# Altium PCB Olimex interface board.PcbDoc (part 1 of 2)
Units mm, origin at the board's own origin, x right, y up, seen from the top; angles counter-clockwise.
Board outline 96.01 x 73.71 mm, 4 copper layers (Component Side, Ground Plane, Power Plane, Solder Side), stack 0.98 mm thick; 92 components, 62 nets, 646 pads, 104 vias.
Unrouted connection lines stored in the file: 1.
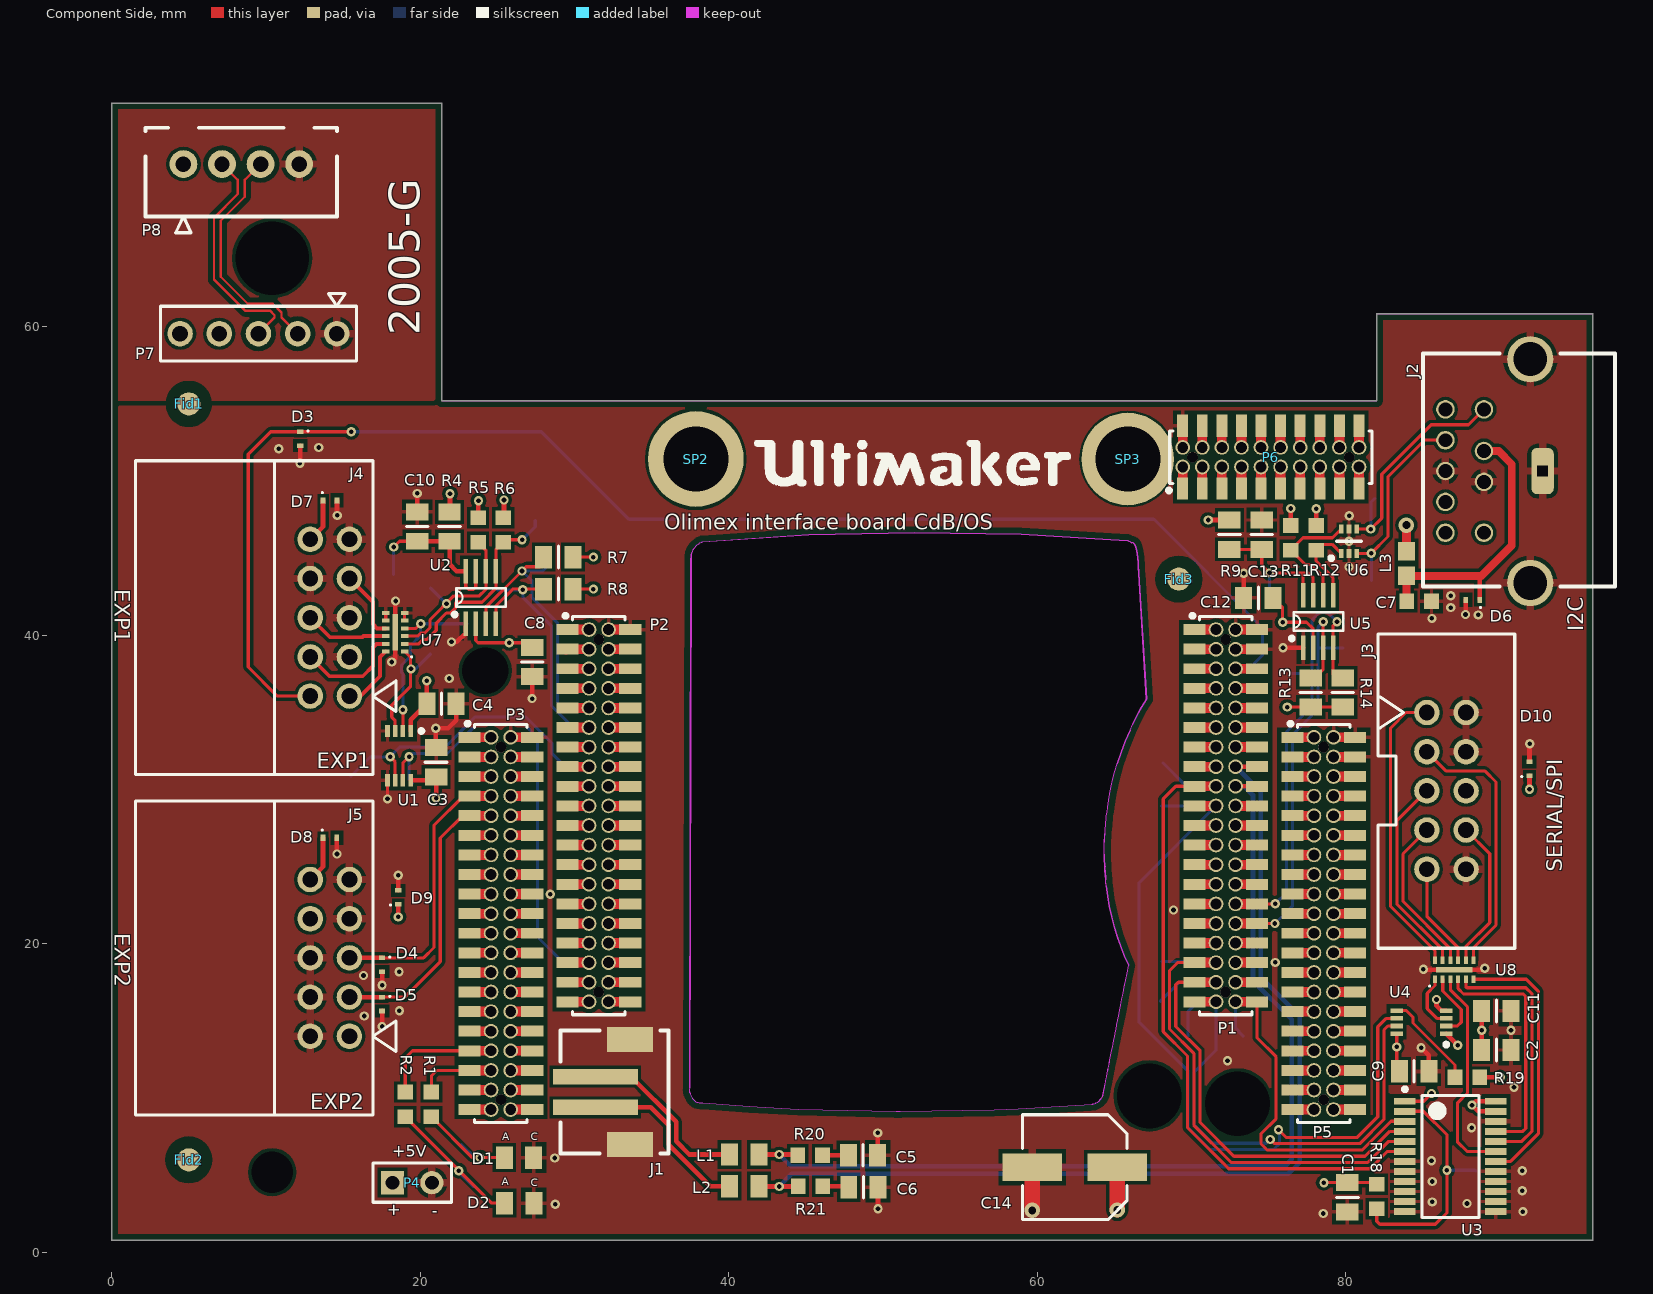
[diagram p0: Component Side view]
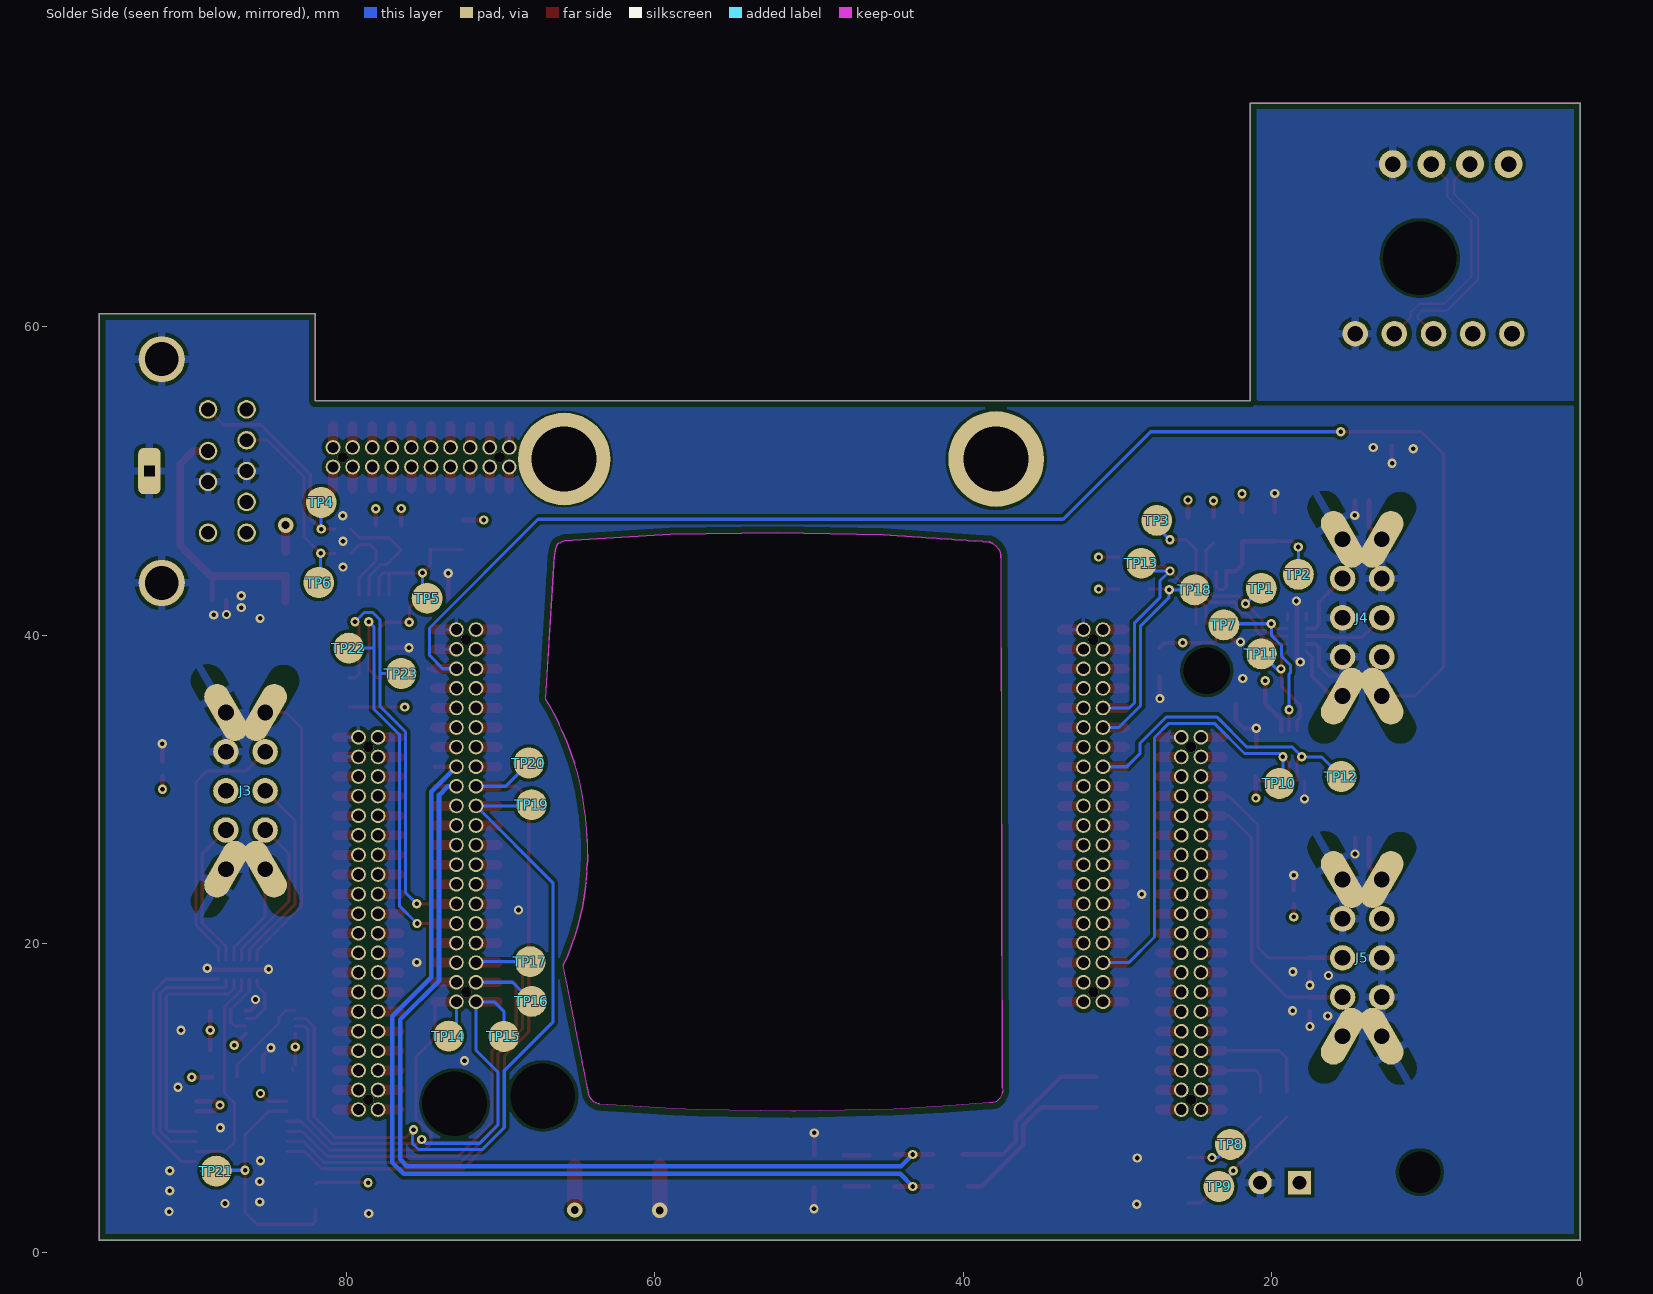
[diagram p1: Solder Side view, seen from below]
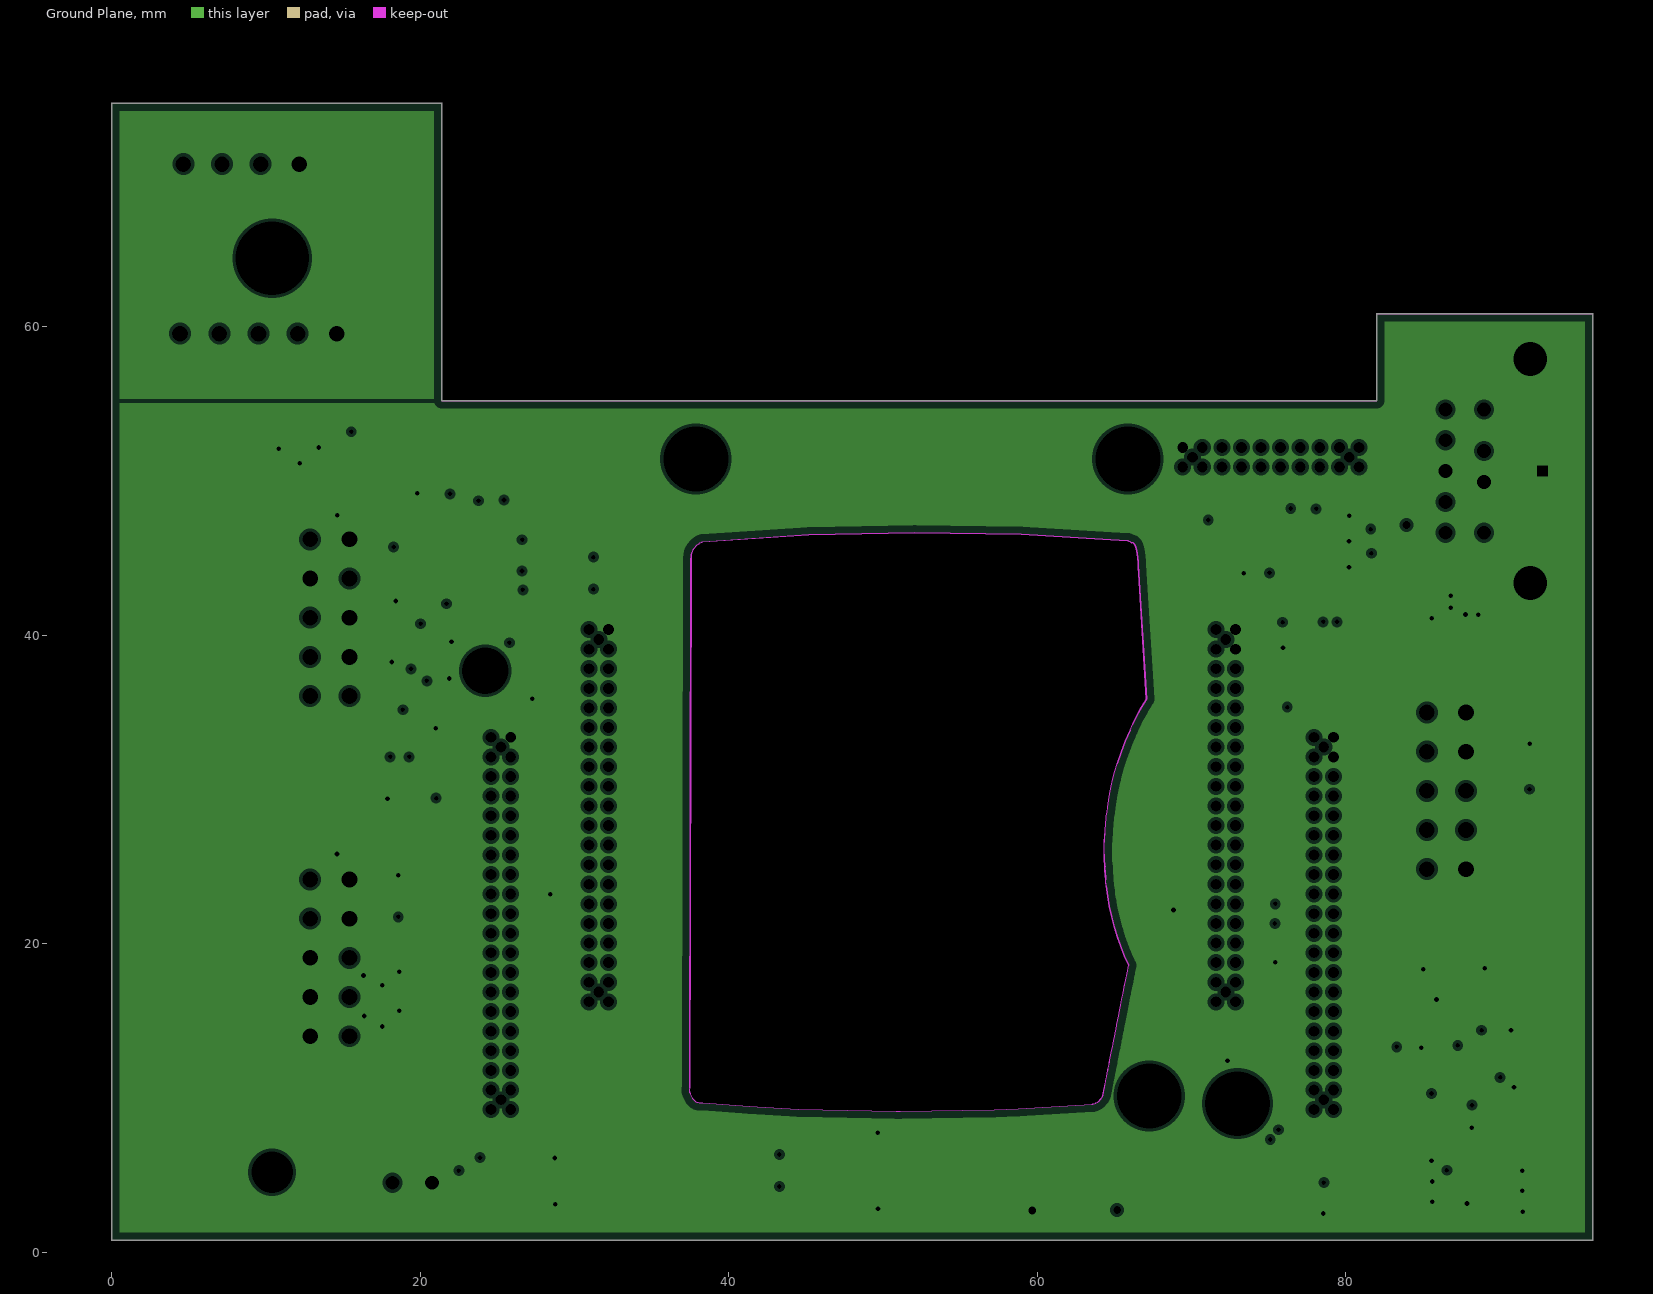
[diagram p2: Ground Plane, clearances drawn from the general rule]
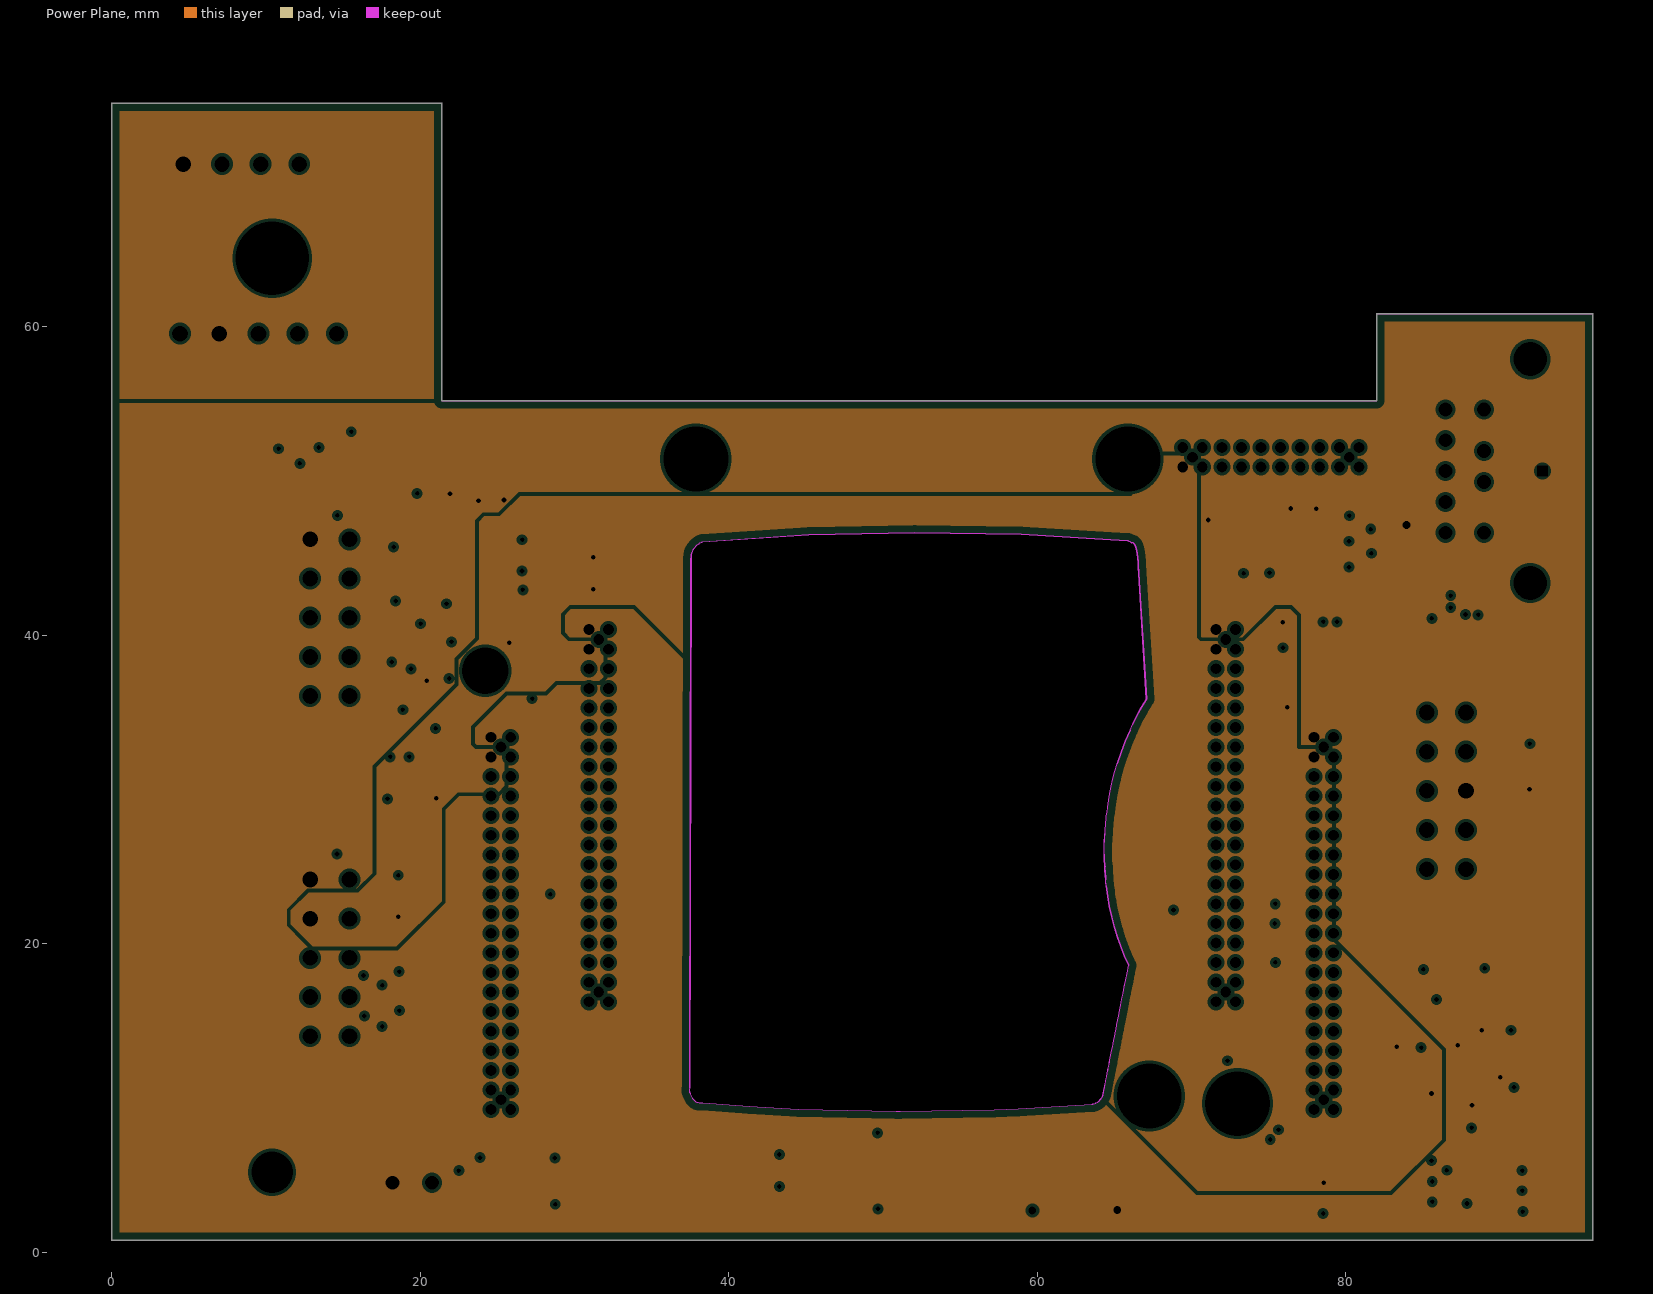
[diagram p3: Power Plane, clearances drawn from the general rule]

## Layer stack, top to bottom
Top Solder: solder mask 0.0102, Solder Resist, Dk 3.5
Component Side: signal copper 0.0356
Dielectric 1: core 0.32, FR-4, Dk 4.8
Ground Plane: plane copper 0.036, net GND
Dielectric 3: prepreg 0.2625, Dk 4.2
Power Plane: plane copper 0.036, net (Multiple Nets)
Dielectric 4: core 0.254, Dk 4.2
Solder Side: signal copper 0.0356
Bottom Solder: solder mask 0.0102, Solder Resist, Dk 3.5

## Board outline
-0.005,0.8 -0.005,74.5 cw(c0,74.5) 0,74.505 21.4,74.505 cw(c21.4,74.5) 21.405,74.5 21.405,55.2 81.995,55.2 81.995,60.85 cw(c82,60.85) 82,60.855 96,60.855 cw(c96,60.85) 96.005,60.85 96.005,0.8 cw(c96,0.8) 96,0.795 0,0.795 cw(c0,0.8)
cut-out: 561 vertices, not listed, extent 37.445,9.158 67.073,46.653

## Design rules (kind name [scope] priority, off if disabled: settings)
Clearance Clearance_1 [InNet('USB_DATA_N') or InNet('USB_DATA_P') vs InPolygon] p1: gap=0.3
Clearance Clearance_USB-GND [InNet('GND') vs InNet('USB_GND')] p2: gap=0.3
Clearance Silktosolder [(IsText AND OnLayer('Bottom Overlay')) vs IsPad] p3: gap=-1.27
Clearance "Board outline" [InPolygon vs OnLayer('Keep-Out Layer')] p4: gap=0.4
Clearance Fiducials [(InComponent('Fid1'))or (InComponent('Fid2'))or  (InComponent('Fid3'))] p5: gap=0.762
Clearance Clearance_Polygon [InComponent('P1') or InComponent('P2') or InComponent('P3') or InComponent('P5') or InComponent('P6') or InComponent('U1') or InComponent('U3') or InComponent('U4') vs InPolygon] p6: gap=0.25
Clearance Clearance_P1,P2,P3,P5,P6 [InComponent('P1') or InComponent('P2') or InComponent('P3') or InComponent('P5') or InComponent('P6') or InComponent('SP3') or InComponent('U1') or InComponent('U3') or InComponent('U4')  or InComponent('U8') or InComponent('U7') or InComponent('U6')] p7: gap=0.127
Clearance [All] p8: gap=0.203
DiffPairsRouting [All] p1: maxlimit=0.3 minlimit=0.3 mostfreqgap=0.3 toplayer_minwidth=0.15 toplayer_maxwidth=0.15 toplayer_prefwidth=0.15 bottomlayer_minwidth=0.15 bottomlayer_maxwidth=0.15 bottomlayer_prefwidth=0.15 maxuncoupledlength=12.7
HoleSize [All] p1: absolutevalues=TRUE maxlimit=4.3 minlimit=0.025 maxpercent=80.000 minpercent=20.000
HoleToHoleClearance HoleToHoleClearance_1 [InComponent('P1') or InComponent('P2') or InComponent('P3') or InComponent('P5') or InComponent('P6')] p1: gap=0.178 allowstackedmicrovias=TRUE
HoleToHoleClearance [All] p2: gap=0.254 allowstackedmicrovias=TRUE
MinimumSolderMaskSliver [All] p1 off: minsoldermaskwidth=0.051
PlaneClearance [All] p1: clearance=0.203
PlaneConnect PlaneConnect_connectors [InComponent('J3', 'J2', 'J5', 'J4', 'P7', 'P8')] p1: planeconnectstyle=Relief reliefexpansion=0.508 reliefentries=4 reliefconductorwidth=0.508 reliefairgap=0.254
PlaneConnect PlaneConnect_2 [InComponent('P1') or InComponent('P2') or InComponent('P3') or InComponent('P5') or InComponent('P6')] p2: planeconnectstyle=Direct reliefexpansion=0.508 reliefentries=4 reliefconductorwidth=0.254 reliefairgap=0.254
PlaneConnect PlaneConnect_1 [IsVia] p3: planeconnectstyle=Direct reliefexpansion=0.508 reliefentries=4 reliefconductorwidth=0.254 reliefairgap=0.254
PlaneConnect [All] p4: planeconnectstyle=Relief reliefexpansion=0.508 reliefentries=4 reliefconductorwidth=0.254 reliefairgap=0.254
PolygonConnect PolygonConnect_connectors [InComponent('P8', 'P7', 'J4', 'J5', 'C14', 'J3', 'J2', 'P4')] p1: connectstyle=Relief reliefconductorwidth=0.508 reliefentries=4 polygonreliefangle="90 Angle" airgapwidth=0.254
PolygonConnect PolygonConnect_J1 [InComponent('J1')] p2: connectstyle=Direct reliefconductorwidth=0.254 reliefentries=4 polygonreliefangle="90 Angle" airgapwidth=0.254
PolygonConnect PolygonConnect_diodes [InComponent('D3') or InComponent('D4') or InComponent('D5') or InComponent('D6') or InComponent('D7') or InComponent('D8') or InComponent('D9') or InComponent('D10')] p3: connectstyle=NoConnect reliefconductorwidth=0.254 reliefentries=4 polygonreliefangle="90 Angle" airgapwidth=0.254
PolygonConnect [IsVia vs IsPolygon] p4: connectstyle=Direct reliefconductorwidth=0.254 reliefentries=4 polygonreliefangle="90 Angle" airgapwidth=0.254
PolygonConnect PolygonConnect_2 [All] p5: connectstyle=Relief reliefconductorwidth=0.254 reliefentries=4 polygonreliefangle="90 Angle" airgapwidth=0.254
RoutingVias [All] p1: holewidth=0.3 width=0.6 viastyle="Through Hole" minholewidth=0.3 minwidth=0.6 maxholewidth=1 maxwidth=3
ShortCircuit ShortCircuitconnectors [InComponent('P1') or InComponent('P2') or InComponent('P3') or InComponent('P5') or InComponent('P6')] p1: allowed=TRUE
ShortCircuit [All] p2: allowed=FALSE
SilkToSilkClearance [All] p1: silktosilkclearance=0
SilkToSolderMaskClearance [(IsText AND OnLayer('Bottom Overlay'))] p1: minsilkscreentomaskgap=-0.254 clearancetoexposedcopper=TRUE
SilkToSolderMaskClearance SilkscreenOverComponentPads [IsPad] p2: minsilkscreentomaskgap=0.127 clearancetoexposedcopper=TRUE
SolderMaskExpansion [All] p1: expansion=0.102
Width [All] p1: maxlimit=10 minlimit=0.127 preferedwidth=0.203
21 further rules are at their usual default settings.

## Classes and differential pairs
component class Schema1: C3 C4 C8 C10 C14 D1 D2 D3 D4 D5 D7 D8 D9 Fid1 Fid2 Fid3 J4 J5 P2 P3 P4 P7 P8 R1 R2 R4 R5 R6 R7 R8 SP2 SP3 TP1 TP2 TP3 TP7 TP8 TP9 TP10 TP11 TP12 TP13 TP18 U1 U2 U7
component class Schema2: C1 C2 C5 C6 C7 C9 C11 C12 C13 D6 D10 J1 J2 J3 L1 L2 L3 P1 P5 P6 R9 R11 R12 R13 R14 R18 R19 R20 R21 TP4 TP5 TP6 TP14 TP15 TP16 TP17 TP19 TP20 TP21 TP22 TP23 U3 U4 U5 U6 U8
differential pair USB_DATA: +USB_DATA_P -USB_DATA_N

## Components (designator, comment, footprint, x,y, rotation, side; value= is the part's Value field where it differs from the comment)
C1 "100nF" "C0805 (2012)" 80.1,3.575 r270 top
C2 "100nF" "C0805 (2012)" 89.75,13.125 r0 top
C3 "100nF" "C0805 (2012)" 21.025,31.775 r90 top
C4 "100nF" "C0805 (2012)" 21.375,35.575 r0 top
C5 "100nF" "C0805 (2012)" 48.7,6.3 r0 top
C6 "100nF" "C0805 (2012)" 48.725,4.225 r0 top
C7 "1uF" CAPC1608X09N 84.75,42.2 r180 top
C8 "100nF" "C0805 (2012)" 27.25,38.275 r90 top
C9 "100nF" "C0805 (2012)" 84.425,11.75 r0 top
C10 "10nF" "C0805 (2012)" 19.8,47.05 r270 top
C11 "100nF" "C0805 (2012)" 89.75,15.65 r0 top
C12 "100nF" "C0805 (2012)" 74.325,42.425 r0 top
C13 "10nF" "C0805 (2012)" 74.55,46.525 r270 top
C14 "470u" CAPAE7866X80M 62.425,5.525 r180 top
D1 "Yellow" LED0805-YELLOW 26.4,6.15 r0 top
D2 "Yellow" LED0805-YELLOW 26.411,3.2 r0 top
D3 "ESD9X3.3ST5G" SODFL100X40-2N 12.225,52.75 r270 top
D4 "ESD9X3.3ST5G" SODFL100X40-2N 17.525,18.65 r270 top
D5 "ESD9X3.3ST5G" SODFL100X40-2N 17.525,16.1 r270 top
D6 "ESD9X5.0ST5G" SODFL100X40-2N 88.225,42.3 r180 top
D7 "ESD9X5.0ST5G" SODFL100X40-2N 14.15,48.75 r0 top
D8 "ESD9X5.0ST5G" SODFL100X40-2N 14.146,26.879 r0 top
D9 "ESD9X3.3ST5G" SODFL100X40-2N 18.575,23.025 r90 top
D10 "ESD9X5.0ST5G" SODFL100X40-2N 91.9,31.35 r90 top
Fid1 "Fiducial" "Fiducial 1,5mm"#1 2.225,64.45 r0 top
Fid2 "Fiducial" "Fiducial 1,5mm"#2 8.15,-10.4 r90 top
Fid3 "Fiducial" "Fiducial 1,5mm"#3 69.175,40.65 r90 top
J1 "B2B-PH-SM4-TB" B2B-PH-SM4-TB 28.6,6.425 r270 top
J2 "Mini-DIN 9" MD-90SM 97.45,50.65 r270 top locked
J3 "UART" BOXHEADER-10P-STRAIGHT 85.25,35 r270 top locked
J4 "EXP1" BOXHEADER-10P-R/A-ST-2.54 15.408,36.064 r90 top locked
J5 "EXP2" BOXHEADER-10P-R/A-ST-2.54 15.408,14.014 r90 top locked
L1 "600R/200mA" R0805 41,6.35 r180 top
L2 "600R/200mA" R0805 41,4.3 r180 top
L3 "120E @ 100MHz" R0603 83.925,44.65 r270 top
P1 "GPIO_3" M50-3152042#1 72.215,28.31 r0 top locked
P2 "GPIO_2" M50-3152042#2 31.575,28.31 r0 top locked
P3 "GPIO_3" M50-3152042#3 25.225,21.325 r0 top locked
P4 "NP" HDR1X2 18.212,4.521 r0 top (schematic designator P1)
P5 "LCD_CON" M50-3152042#4 78.565,21.325 r0 top locked (schematic designator P0)
P6 "NP" ? 70.055,51.55 r90 top locked
P7 "Header 5" "Female Header 5 pins" 14.592,59.556 r180 top locked
P8 "" B4B-XH-A 4.65,70.55 r0 top locked
R1 "330E" RESC1608X05N 20.725,9.6 r90 top
R2 "330E" RESC1608X05N 19.025,9.6 r90 top
R4 "191K" "R0805 (2012)" 21.9,47.05 r90 top
R5 "1K5" RESC1608X05N 23.75,46.825 r90 top
R6 "1K5" RESC1608X05N 25.375,46.825 r90 top
R7 "NP" "R0805 (2012)" 28.95,45.075 r0 top
R8 "NP" "R0805 (2012)" 28.95,43 r0 top
R9 "191K" "R0805 (2012)" 72.45,46.525 r90 top
R11 "1K5" RESC1608X05N 76.425,46.325 r90 top
R12 "1K5" RESC1608X05N 78.075,46.325 r90 top
R13 "NP" "R0805 (2012)" 77.725,36.3 r270 top
R14 "NP" "R0805 (2012)" 79.8,36.3 r270 top
R18 "47k" RESC1608X05N 82,3.625 r270 top
R19 "47k" RESC1608X05N 87.875,11.35 r180 top
R20 "22R" RESC1608X05N 45.275,6.3 r180 top
R21 "22R" RESC1608X05N 45.3,4.3 r180 top
SP2 "M3-2ET" "SPACER M3-4ET" 37.865,51.43 r0 top
SP3 "M3-2ET" "SPACER M3-4ETKLEINEPAD" 65.865,51.43 r0 top locked
TP1 "2mm" "TESTPOINT 2mm"#1 20.675,43.05 r180 bottom
TP2 "2mm" "TESTPOINT 2mm"#2 18.25,43.95 r90 bottom
TP3 "2mm" "TESTPOINT 2mm"#1 27.45,47.45 r90 bottom
TP4 "2mm" "TESTPOINT 2mm"#1 81.615,48.615 r90 bottom
TP5 "2mm" "TESTPOINT 2mm"#1 74.75,42.4 r90 bottom
TP6 "2mm" "TESTPOINT 2mm"#1 81.775,43.425 r90 bottom
TP7 "2mm" "TESTPOINT 2mm"#1 23.1,40.675 r90 bottom
TP8 "2mm" "TESTPOINT 2mm"#1 22.675,7 r90 bottom
TP9 "2mm" "TESTPOINT 2mm"#1 23.425,4.275 r90 bottom
TP10 "2mm" "TESTPOINT 2mm"#1 19.5,30.4 r90 bottom
TP11 "2mm" "TESTPOINT 2mm"#1 20.675,38.8 r90 bottom
TP12 "2mm" "TESTPOINT 2mm"#1 15.5,30.85 r90 bottom
TP13 "2mm" "TESTPOINT 2mm"#1 28.45,44.675 r90 bottom
TP14 "2mm" "TESTPOINT 2mm"#1 73.35,14.025 r90 bottom
TP15 "2mm" "TESTPOINT 2mm"#1 69.775,14 r90 bottom
TP16 "2mm" "TESTPOINT 2mm"#1 67.975,16.275 r90 bottom
TP17 "2mm" "TESTPOINT 2mm"#1 68.075,18.85 r90 bottom
TP18 "2mm" "TESTPOINT 2mm"#1 25,42.95 r90 bottom
TP19 "2mm" "TESTPOINT 2mm"#1 67.975,29.025 r90 bottom
TP20 "2mm" "TESTPOINT 2mm"#1 68.15,31.725 r90 bottom
TP21 "2mm" "TESTPOINT 2mm"#1 88.425,5.275 r90 bottom
TP22 "2mm" "TESTPOINT 2mm"#1 79.825,39.175 r90 bottom
TP23 "2mm" "TESTPOINT 2mm"#1 76.425,37.525 r90 bottom
U1 "74LVC2T45DC,125" TSSOP50P310X100-8N 18.625,32.2 r270 top
U2 "PCA9306" "IC SSOP-8" 22.95,40.75 r0 top
U3 "74LVC8T245PW,118" TSOP65P640X110-24N 86.775,6.225 r0 top
U4 "74LVC2T45DC,125" TSSOP50P310X100-8N 84.9,14.925 r180 top
U5 "PCA9306" "IC SSOP-8" 77.225,39.2 r0 top
U6 "NUF2230" SOTFL50P160X60-6N 80.2,46.1 r90 top
U7 "NUF6401" SON50P140X100_HS-13N 18.375,40.2 r180 top
U8 "NUF6401" SON50P140X100_HS-13N 87.025,18.325 r90 top

## Footprints (in the part's own frame and the unit in brackets; to place one, negate y for a bottom-side part, rotate by r counter-clockwise, add the part's x,y. Pads: shape width x height; smd on the part's side, far side on the other; paste and mask are expansions set on the pad)
B2B-PH-SM4-TB [mm] "JST B2B-PH-SM4-TB"
  rect 1.6x3 smd: 0(-7.375,5) 0(-0.575,5)
  rect 1x5.5 smd: 1(-4.975,2.75) 2(-2.975,2.75)
  silkscreen extent -7.95,0.5 0,7.5, body extent -7.95,0.5 0,7.5, height 6.61
B4B-XH-A [mm]
  round 1.8 hole 1: 1(0,0) 2(2.5,0) 3(5,0) 4(7.5,0)
  silkscreen extent -2.45,-4.45 9.95,2.35, body extent -2.45,-3.4 9.95,2.35, height 7.05
BOXHEADER-10P-R/A-ST-2.54 [mm]
  round 1.65 hole 1.02: 1(0,0) 2(0,2.54) 3(2.54,0) 4(2.54,2.54) 5(5.08,0) 6(5.08,2.54) 7(7.62,0) 8(7.62,2.54) 9(10.16,0) 10(10.16,2.54)
  oval 1.65x4 smd far side rot 120 paste-2 mask+0: 1(0,0) 10(10.16,2.54)
  oval 1.65x4 smd far side rot 60 paste-2 mask+0: 2(0,2.54) 9(10.16,0)
  silkscreen extent -5.09,-3.02 15.26,13.86, body extent -5.08,-0.32 15.24,13.86, height 8.8
BOXHEADER-10P-STRAIGHT [mm]
  round 1.65 hole 1.02: 1(0,0) 2(0,2.54) 3(2.54,0) 4(2.54,2.54) 5(5.08,0) 6(5.08,2.54) 7(7.62,0) 8(7.62,2.54) 9(10.16,0) 10(10.16,2.54)
  oval 1.65x4 smd far side rot 120 paste-2 mask+0: 1(0,0) 10(10.16,2.54)
  oval 1.65x4 smd far side rot 60 paste-2 mask+0: 2(0,2.54) 9(10.16,0)
  silkscreen extent -5.08,-3.16 15.28,5.7, body extent -5.1,-3.17 15.26,5.92, height 9.12
"C0805 (2012)" [mm] "hip Capacitor, 2-Leads, Body 2,0x1.25mm, IPC Medium Density"
  rect 1.1x1.45 smd: 1(-0.95,0) 2(0.95,0)
  silkscreen extent 0,-0.7 0,0.7, body extent -1,-0.6 1,0.6, height 1.19
CAPAE7866X80M [mm] "Aluminum Electrolytic Capacitor, Body 6,60x6,60x8,00mm, IPC Low Density"
  rect 3.85x1.8 smd: 1(-2.75,0) 2(2.75,0)
  silkscreen extent -3.4,-3.4 3.4,3.4, body extent -3.4,-3.4 3.4,3.4, height 8
CAPC1608X09N [mm] "Chip Capacitor, 2-Leads, Body 1.6x0.8mm, IPC Medium Density"
  rect 0.95x1 smd: 1(-0.8,0) 2(0.8,0)
  body extent -0.85,-0.45 0.85,0.45, height 0.9
"Female Header 5 pins" [mm]
  round 1.65 hole 1.02: 1(0,0) 2(2.54,0) 3(5.08,0) 4(7.62,0) 5(10.16,0)
  silkscreen extent -1.27,-2.6 11.43,1.78, body extent -1.27,-1.78 11.43,1.78, height 8.66
"Fiducial 1,5mm"#1 [mm] "Fiducial 1,5mm"
  round 1.5 smd paste-3 mask+0.75: ""(2.775,-9.45)
"Fiducial 1,5mm"#2 [mm] "Fiducial 1,5mm"
  round 1.5 smd paste-3 mask+0.75: ""(16.4,3.15)
"Fiducial 1,5mm"#3 [mm] "Fiducial 1,5mm"
  round 1.5 smd paste-3 mask+0.75: ""(3,0)
HDR1X2 [mm] "Connector; Header; 2 Position"
  rect 1.5x1.5 hole 0.9: 1(0,0)
  round 1.5 hole 0.9: 2(2.54,0)
  silkscreen extent -1.27,-1.27 3.81,1.27
"IC SSOP-8" [mm] "IC SSOP-8 SMD"
  rect 0.3x1.6 smd paste+0: 1(0,0) 2(0.65,0) 3(1.3,0) 4(1.95,0) 5(1.95,3.4) 6(1.3,3.4) 7(0.65,3.4) 8(0,3.4)
  silkscreen extent -0.85,0.48 2.6,2.3, body extent -0.6,0.3 2.6,3.2, height 1.3
LED0805-YELLOW [mm]
  rect 1.1x1.45 smd: 1(-0.95,0) 2(0.95,0)
  body extent -1.01,-0.62 1.01,0.63, height 1.1
M50-3152042#1 [mm] "Harwin M50-3152042"
  round 0.7 hole 0.7 unplated paste+0 mask+0: 0(0,-11.43) 0(0,11.43)
  rect 1.437x0.71 smd mask+0: 1(-2.032,12.065) 2(2.032,12.065) 3(-2.032,10.795) 4(2.032,10.795) 5(-2.032,9.525) 6(2.032,9.525) 7(-2.032,8.255) 8(2.032,8.255) 9(-2.032,6.985) 10(2.032,6.985) 11(-2.032,5.715) 12(2.032,5.715) 13(-2.032,4.445) 14(2.032,4.445) 15(-2.032,3.175) 16(2.032,3.175) 17(-2.032,1.905) 18(2.032,1.905) 19(-2.032,0.635) 20(2.032,0.635) 21(-2.032,-0.635) 22(2.032,-0.635) 24(2.032,-1.905) 25(-2.032,-3.175) 26(2.032,-3.175) 27(-2.032,-4.445) 28(2.032,-4.445) 29(-2.032,-5.715) 30(2.032,-5.715) 31(-2.032,-6.985) 32(2.032,-6.985) 33(-2.032,-8.255) 34(2.032,-8.255) 35(-2.032,-9.525) 36(2.032,-9.525) 37(-2.032,-10.795) 38(2.032,-10.795) 39(-2.032,-12.065) 40(2.032,-12.065)
  round 0.954 hole 0.7 paste+0 mask+0: 1(-0.635,12.065) 2(0.635,12.065) 3(-0.635,10.795) 4(0.635,10.795) 5(-0.635,9.525) 6(0.635,9.525) 7(-0.635,8.255) 8(0.635,8.255) 9(-0.635,6.985) 10(0.635,6.985) 11(-0.635,5.715) 12(0.635,5.715) 13(-0.635,4.445) 14(0.635,4.445) 15(-0.635,3.175) 16(0.635,3.175) 17(-0.635,1.905) 18(0.635,1.905) 19(-0.635,0.635) 20(0.635,0.635) 21(-0.635,-0.635) 22(0.635,-0.635) 23(-0.635,-1.905) 24(0.635,-1.905) 25(-0.635,-3.175) 26(0.635,-3.175) 27(-0.635,-4.445) 28(0.635,-4.445) 29(-0.635,-5.715) 30(0.635,-5.715) 31(-0.635,-6.985) 32(0.635,-6.985) 33(-0.635,-8.255) 34(0.635,-8.255) 35(-0.635,-9.525) 36(0.635,-9.525) 37(-0.635,-10.795) 38(0.635,-10.795) 39(-0.635,-12.065) 40(0.635,-12.065)
  rect 1.437x0.71 smd paste+0 mask+0: 23(-2.032,-1.905)
  Component Side lines w0.3: 0.635,1.905 1.625,1.905 1.925,1.905 2.032,1.905 ; 0.635,3.175 1.62,3.175 2.032,3.175
  Component Side lines w0.635: -2.032,-12.065 -0.635,-12.065 ; -2.032,-10.795 -1.925,-10.795 -0.635,-10.795 ; -2.032,-9.525 -1.925,-9.525 -0.635,-9.525 ; -2.032,-8.255 -0.635,-8.255 ; -2.032,-6.985 -0.635,-6.985 ; -2.032,-5.715 -0.635,-5.715 ; -2.032,-4.445 -0.635,-4.445 ; -2.032,-3.175 -0.635,-3.175 ; -2.032,-1.905 -0.635,-1.905 ; -2.032,-0.635 -0.635,-0.635 ; -2.032,0.635 -1.925,0.635 -1.51,0.635 -0.635,0.635 ; -2.032,1.905 -1.925,1.905 -0.635,1.905 ; -2.032,3.175 -0.635,3.175 ; -2.032,4.445 -0.635,4.445 ; -2.032,5.715 -0.635,5.715 ; -2.032,6.985 -0.635,6.985 ; -2.032,8.255 -0.635,8.255 ; -2.032,9.525 -0.635,9.525 ; -2.032,10.795 -0.635,10.795 ; -2.032,12.065 -0.635,12.065 ; 0.635,-12.065 2.032,-12.065 ; 0.635,-10.795 2.032,-10.795 ; 0.635,-9.525 2.032,-9.525 ; 0.635,-8.255 2.032,-8.255 ; 0.635,-6.985 2.032,-6.985 ; 0.635,-5.715 2.032,-5.715 ; 0.635,-4.445 2.032,-4.445 ; 0.635,-3.175 2.032,-3.175 ; 0.635,-1.905 2.032,-1.905 ; 0.635,-0.635 2.032,-0.635 ; 0.635,0.635 2.032,0.635 ; 0.635,4.445 1.615,4.445 2.032,4.445 ; 0.635,5.715 2.032,5.715 ; 0.635,6.985 2.032,6.985 ; 0.635,8.255 2.032,8.255 ; 0.635,9.525 1.575,9.525 1.925,9.525 2.032,9.525 ; 0.635,10.795 2.032,10.795 ; 0.635,12.065 2.032,12.065
  silkscreen extent -2.28,-12.9 1.7,13.08, body extent -1.7,-12.9 1.7,12.9, height 2.2
M50-3152042#2 [mm] "Harwin M50-3152042"
  round 0.7 hole 0.7 unplated paste+0 mask+0: 0(0,-11.43) 0(0,11.43)
  rect 1.437x0.71 smd mask+0: 1(-2.032,12.065) 2(2.032,12.065) 3(-2.032,10.795) 4(2.032,10.795) 5(-2.032,9.525) 6(2.032,9.525) 7(-2.032,8.255) 8(2.032,8.255) 9(-2.032,6.985) 10(2.032,6.985) 11(-2.032,5.715) 12(2.032,5.715) 13(-2.032,4.445) 14(2.032,4.445) 15(-2.032,3.175) 16(2.032,3.175) 17(-2.032,1.905) 18(2.032,1.905) 19(-2.032,0.635) 20(2.032,0.635) 21(-2.032,-0.635) 22(2.032,-0.635) 24(2.032,-1.905) 25(-2.032,-3.175) 26(2.032,-3.175) 27(-2.032,-4.445) 28(2.032,-4.445) 29(-2.032,-5.715) 30(2.032,-5.715) 31(-2.032,-6.985) 32(2.032,-6.985) 33(-2.032,-8.255) 34(2.032,-8.255) 35(-2.032,-9.525) 36(2.032,-9.525) 37(-2.032,-10.795) 38(2.032,-10.795) 39(-2.032,-12.065) 40(2.032,-12.065)
  round 0.954 hole 0.7 paste+0 mask+0: 1(-0.635,12.065) 2(0.635,12.065) 3(-0.635,10.795) 4(0.635,10.795) 5(-0.635,9.525) 6(0.635,9.525) 7(-0.635,8.255) 8(0.635,8.255) 9(-0.635,6.985) 10(0.635,6.985) 11(-0.635,5.715) 12(0.635,5.715) 13(-0.635,4.445) 14(0.635,4.445) 15(-0.635,3.175) 16(0.635,3.175) 17(-0.635,1.905) 18(0.635,1.905) 19(-0.635,0.635) 20(0.635,0.635) 21(-0.635,-0.635) 22(0.635,-0.635) 23(-0.635,-1.905) 24(0.635,-1.905) 25(-0.635,-3.175) 26(0.635,-3.175) 27(-0.635,-4.445) 28(0.635,-4.445) 29(-0.635,-5.715) 30(0.635,-5.715) 31(-0.635,-6.985) 32(0.635,-6.985) 33(-0.635,-8.255) 34(0.635,-8.255) 35(-0.635,-9.525) 36(0.635,-9.525) 37(-0.635,-10.795) 38(0.635,-10.795) 39(-0.635,-12.065) 40(0.635,-12.065)
  rect 1.437x0.71 smd paste+0 mask+0: 23(-2.032,-1.905)
  Component Side lines w0.635: -2.032,-12.065 -0.635,-12.065 ; -2.032,-10.795 -0.635,-10.795 ; -2.032,-9.525 -1.925,-9.525 -1.565,-9.525 -0.635,-9.525 ; -2.032,-8.255 -0.635,-8.255 ; -2.032,-6.985 -0.635,-6.985 ; -2.032,-5.715 -0.635,-5.715 ; -2.032,-4.445 -0.635,-4.445 ; -2.032,-3.175 -1.925,-3.175 -1.51,-3.175 -0.635,-3.175 ; -2.032,-1.905 -1.925,-1.905 -1.48,-1.905 -0.635,-1.905 ; -2.032,-0.635 -1.925,-0.635 -0.635,-0.635 ; -2.032,0.635 -0.635,0.635 ; -2.032,1.905 -0.635,1.905 ; -2.032,3.175 -1.925,3.175 -1.589,3.175 -0.635,3.175 ; -2.032,4.445 -1.925,4.445 -1.52,4.445 -0.635,4.445 ; -2.032,5.715 -0.635,5.715 ; -2.032,6.985 -1.925,6.985 -0.635,6.985 ; -2.032,8.255 -0.635,8.255 ; -2.032,9.525 -0.635,9.525 ; -2.032,10.795 -0.635,10.795 ; -2.032,12.065 -0.635,12.065 ; 0.635,-12.065 1.925,-12.065 2.032,-12.065 ; 0.635,-10.795 1.925,-10.795 2.032,-10.795 ; 0.635,-9.525 1.925,-9.525 2.032,-9.525 ; 0.635,-8.255 1.561,-8.255 2.032,-8.255 ; 0.635,-6.985 2.032,-6.985 ; 0.635,-5.715 2.032,-5.715 ; 0.635,-4.445 2.032,-4.445 ; 0.635,-3.175 2.032,-3.175 ; 0.635,-1.905 2.032,-1.905 ; 0.635,-0.635 2.032,-0.635 ; 0.635,0.635 2.032,0.635 ; 0.635,1.905 2.032,1.905 ; 0.635,3.175 2.032,3.175 ; 0.635,4.445 2.032,4.445 ; 0.635,5.715 2.032,5.715 ; 0.635,6.985 2.032,6.985 ; 0.635,8.255 2.032,8.255 ; 0.635,9.525 2.032,9.525 ; 0.635,10.795 2.032,10.795 ; 0.635,12.065 2.032,12.065
  silkscreen extent -2.28,-12.9 1.7,13.08, body extent -1.7,-12.9 1.7,12.9, height 2.2
M50-3152042#3 [mm] "Harwin M50-3152042"
  round 0.7 hole 0.7 unplated paste+0 mask+0: 0(0,-11.43) 0(0,11.43)
  rect 1.437x0.71 smd mask+0: 1(-2.032,12.065) 2(2.032,12.065) 3(-2.032,10.795) 4(2.032,10.795) 5(-2.032,9.525) 6(2.032,9.525) 7(-2.032,8.255) 8(2.032,8.255) 9(-2.032,6.985) 10(2.032,6.985) 11(-2.032,5.715) 12(2.032,5.715) 13(-2.032,4.445) 14(2.032,4.445) 15(-2.032,3.175) 16(2.032,3.175) 17(-2.032,1.905) 18(2.032,1.905) 19(-2.032,0.635) 20(2.032,0.635) 21(-2.032,-0.635) 22(2.032,-0.635) 24(2.032,-1.905) 25(-2.032,-3.175) 26(2.032,-3.175) 27(-2.032,-4.445) 28(2.032,-4.445) 29(-2.032,-5.715) 30(2.032,-5.715) 31(-2.032,-6.985) 32(2.032,-6.985) 33(-2.032,-8.255) 34(2.032,-8.255) 35(-2.032,-9.525) 36(2.032,-9.525) 37(-2.032,-10.795) 38(2.032,-10.795) 39(-2.032,-12.065) 40(2.032,-12.065)
  round 0.954 hole 0.7 paste+0 mask+0: 1(-0.635,12.065) 2(0.635,12.065) 3(-0.635,10.795) 4(0.635,10.795) 5(-0.635,9.525) 6(0.635,9.525) 7(-0.635,8.255) 8(0.635,8.255) 9(-0.635,6.985) 10(0.635,6.985) 11(-0.635,5.715) 12(0.635,5.715) 13(-0.635,4.445) 14(0.635,4.445) 15(-0.635,3.175) 16(0.635,3.175) 17(-0.635,1.905) 18(0.635,1.905) 19(-0.635,0.635) 20(0.635,0.635) 21(-0.635,-0.635) 22(0.635,-0.635) 23(-0.635,-1.905) 24(0.635,-1.905) 25(-0.635,-3.175) 26(0.635,-3.175) 27(-0.635,-4.445) 28(0.635,-4.445) 29(-0.635,-5.715) 30(0.635,-5.715) 31(-0.635,-6.985) 32(0.635,-6.985) 33(-0.635,-8.255) 34(0.635,-8.255) 35(-0.635,-9.525) 36(0.635,-9.525) 37(-0.635,-10.795) 38(0.635,-10.795) 39(-0.635,-12.065) 40(0.635,-12.065)
  rect 1.437x0.71 smd paste+0 mask+0: 23(-2.032,-1.905)
  Component Side lines w0.635: -2.032,-12.065 -0.635,-12.065 ; -2.032,-10.795 -0.635,-10.795 ; -2.032,-9.525 -1.925,-9.525 -0.635,-9.525 ; -2.032,-8.255 -1.925,-8.255 -0.635,-8.255 ; -2.032,-6.985 -0.635,-6.985 ; -2.032,-5.715 -0.635,-5.715 ; -2.032,-4.445 -0.635,-4.445 ; -2.032,-3.175 -0.635,-3.175 ; -2.032,-1.905 -0.635,-1.905 ; -2.032,-0.635 -0.635,-0.635 ; -2.032,0.635 -0.635,0.635 ; -2.032,1.905 -0.635,1.905 ; -2.032,3.175 -0.635,3.175 ; -2.032,4.445 -0.635,4.445 ; -2.032,5.715 -0.635,5.715 ; -2.032,6.985 -0.635,6.985 ; -2.032,8.255 -0.635,8.255 ; -2.032,9.525 -0.635,9.525 ; -2.032,10.795 -0.635,10.795 ; -2.032,12.065 -0.635,12.065 ; 0.635,-12.065 2.032,-12.065 ; 0.635,-10.795 2.032,-10.795 ; 0.635,-9.525 2.032,-9.525 ; 0.635,-8.255 2.032,-8.255 ; 0.635,-6.985 2.032,-6.985 ; 0.635,-5.715 2.032,-5.715 ; 0.635,-4.445 2.032,-4.445 ; 0.635,-3.175 2.032,-3.175 ; 0.635,-1.905 2.032,-1.905 ; 0.635,-0.635 2.032,-0.635 ; 0.635,0.635 2.032,0.635 ; 0.635,1.905 2.032,1.905 ; 0.635,3.175 2.032,3.175 ; 0.635,4.445 2.032,4.445 ; 0.635,5.715 2.032,5.715 ; 0.635,6.985 2.032,6.985 ; 0.635,8.255 2.032,8.255 ; 0.635,9.525 2.032,9.525 ; 0.635,10.795 2.032,10.795 ; 0.635,12.065 2.032,12.065
  silkscreen extent -2.28,-12.9 1.7,13.08, body extent -1.7,-12.9 1.7,12.9, height 2.2
M50-3152042#4 [mm] "Harwin M50-3152042"
  round 0.7 hole 0.7 unplated paste+0 mask+0: 0(0,-11.43) 0(0,11.43)
  rect 1.437x0.71 smd mask+0: 1(-2.032,12.065) 2(2.032,12.065) 3(-2.032,10.795) 4(2.032,10.795) 5(-2.032,9.525) 6(2.032,9.525) 7(-2.032,8.255) 8(2.032,8.255) 9(-2.032,6.985) 10(2.032,6.985) 11(-2.032,5.715) 12(2.032,5.715) 13(-2.032,4.445) 14(2.032,4.445) 15(-2.032,3.175) 16(2.032,3.175) 17(-2.032,1.905) 18(2.032,1.905) 19(-2.032,0.635) 20(2.032,0.635) 21(-2.032,-0.635) 22(2.032,-0.635) 24(2.032,-1.905) 25(-2.032,-3.175) 26(2.032,-3.175) 27(-2.032,-4.445) 28(2.032,-4.445) 29(-2.032,-5.715) 30(2.032,-5.715) 31(-2.032,-6.985) 32(2.032,-6.985) 33(-2.032,-8.255) 34(2.032,-8.255) 35(-2.032,-9.525) 36(2.032,-9.525) 37(-2.032,-10.795) 38(2.032,-10.795) 39(-2.032,-12.065) 40(2.032,-12.065)
  round 0.954 hole 0.7 paste+0 mask+0: 1(-0.635,12.065) 2(0.635,12.065) 3(-0.635,10.795) 4(0.635,10.795) 5(-0.635,9.525) 6(0.635,9.525) 7(-0.635,8.255) 8(0.635,8.255) 9(-0.635,6.985) 10(0.635,6.985) 11(-0.635,5.715) 12(0.635,5.715) 13(-0.635,4.445) 14(0.635,4.445) 15(-0.635,3.175) 16(0.635,3.175) 17(-0.635,1.905) 18(0.635,1.905) 19(-0.635,0.635) 20(0.635,0.635) 21(-0.635,-0.635) 22(0.635,-0.635) 23(-0.635,-1.905) 24(0.635,-1.905) 25(-0.635,-3.175) 26(0.635,-3.175) 27(-0.635,-4.445) 28(0.635,-4.445) 29(-0.635,-5.715) 30(0.635,-5.715) 31(-0.635,-6.985) 32(0.635,-6.985) 33(-0.635,-8.255) 34(0.635,-8.255) 35(-0.635,-9.525) 36(0.635,-9.525) 37(-0.635,-10.795) 38(0.635,-10.795) 39(-0.635,-12.065) 40(0.635,-12.065)
  rect 1.437x0.71 smd paste+0 mask+0: 23(-2.032,-1.905)
  Component Side lines w0.635: -2.032,-12.065 -0.635,-12.065 ; -2.032,-10.795 -0.635,-10.795 ; -2.032,-9.525 -0.635,-9.525 ; -2.032,-8.255 -0.635,-8.255 ; -2.032,-6.985 -0.635,-6.985 ; -2.032,-5.715 -0.635,-5.715 ; -2.032,-4.445 -0.635,-4.445 ; -2.032,-3.175 -0.635,-3.175 ; -2.032,-1.905 -0.635,-1.905 ; -2.032,-0.635 -0.635,-0.635 ; -2.032,0.635 -0.635,0.635 ; -2.032,1.905 -0.635,1.905 ; -2.032,3.175 -0.635,3.175 ; -2.032,4.445 -0.635,4.445 ; -2.032,5.715 -0.635,5.715 ; -2.032,6.985 -0.635,6.985 ; -2.032,8.255 -0.635,8.255 ; -2.032,9.525 -0.635,9.525 ; -2.032,10.795 -0.635,10.795 ; -2.032,12.065 -0.635,12.065 ; 0.635,-12.065 2.032,-12.065 ; 0.635,-10.795 2.032,-10.795 ; 0.635,-9.525 2.032,-9.525 ; 0.635,-8.255 2.032,-8.255 ; 0.635,-6.985 2.032,-6.985 ; 0.635,-5.715 2.032,-5.715 ; 0.635,-4.445 2.032,-4.445 ; 0.635,-3.175 2.032,-3.175 ; 0.635,-1.905 2.032,-1.905 ; 0.635,-0.635 2.032,-0.635 ; 0.635,0.635 2.032,0.635 ; 0.635,1.905 2.032,1.905 ; 0.635,3.175 2.032,3.175 ; 0.635,4.445 2.032,4.445 ; 0.635,5.715 2.032,5.715 ; 0.635,6.985 2.032,6.985 ; 0.635,8.255 2.032,8.255 ; 0.635,9.525 2.032,9.525 ; 0.635,10.795 2.032,10.795 ; 0.635,12.065 2.032,12.065
  silkscreen extent -2.28,-12.9 1.7,13.08, body extent -1.7,-12.9 1.7,12.9, height 2.2
MD-90SM [mm] "Mini-DIN connector"
  round 3 hole 2.2: 0(-7.25,-5.5) 0(7.25,-5.5)
  rrect50% 3x1.45 hole 0.7 square: 0(0,-4.7)
  round 1.2 hole 0.9: 1(-1.3,-8.5) 2(0.7,-8.5) 3(-4,-8.5) 4(-2,-11) 5(0,-11) 6(4,-8.5) 7(-4,-11) 8(2,-11) 9(4,-11)
  silkscreen extent -7.62,-12.45 7.49,0, body extent -7.62,-12.47 7.52,0.03, height 12.93
R0603 [mm] "hip Resistor, 2-Leads, Body 1.55x0.85mm, IPC Medium Density"
  rect 1.2x1.1 smd mask+0.102: 1(-0.8,0) 2(0.8,0)
  body extent -0.77,-0.42 0.78,0.43, height 0.45
R0805 [mm] "hip Resistor, 2-Leads, Body 2,0x1.25mm, IPC Medium Density"
  rect 1.1x1.45 smd mask+0.203: 1(-0.95,0) 2(0.95,0)
  body extent -1,-0.6 1,0.65, height 0.44
"R0805 (2012)" [mm] "hip Resistor, 2-Leads, Body 2,0x1.25mm, IPC Medium Density"
  rect 1.1x1.45 smd: 1(-0.95,0) 2(0.95,0)
  silkscreen extent 0,-0.7 0,0.7, body extent -1,-0.6 1,0.65, height 0.44
RESC1608X05N [mm] "Chip Resistor, 2-Leads, Body 1.6x0.8mm, IPC Medium Density"
  rect 0.95x1 smd: 1(-0.8,0) 2(0.8,0)
  body extent -0.85,-0.48 0.85,0.47, height 0.5
SODFL100X40-2N [mm] "SODFL, 2-Leads, Body 0,60x1,00mm, IPC Medium Density"
  rect 0.3x0.4 smd: 1(-0.45,0) 2(0.45,0)
  silkscreen extent -0.55,0.45 -0.45,0.55, body extent -0.42,-0.33 0.43,0.33, height 0.4
SON50P140X100_HS-13N [mm] "SON, 12-Leads, Body 3,00x1,35mm, Pitch 0,50mm, Thermal Pad 2,20x0,13mm, IPC Medium Density"
  rect 0.479x0.265 smd: 1(-0.614,1.25) 2(-0.614,0.75) 3(-0.614,0.25) 4(-0.614,-0.25) 5(-0.614,-0.75) 6(-0.614,-1.25) 7(0.614,-1.25) 8(0.614,-0.75) 9(0.614,-0.25) 10(0.614,0.25) 11(0.614,0.75) 12(0.614,1.25)
  rect 0.351x2.352 smd: 13(0,0)
  silkscreen extent -1.12,1.54 -1.02,1.64, body extent -0.67,-1.5 0.67,1.5, height 1
SOTFL50P160X60-6N [mm]
  rect 0.57x0.3 smd: 1(-0.79,0.5) 2(-0.79,0) 3(-0.79,-0.5) 4(0.79,-0.5) 5(0.79,0) 6(0.79,0.5)
  silkscreen extent -1.22,-0.8 0,1.27
"SPACER M3-4ET" [mm] "SPACER M3-4ET"
  round 6.2 hole 4.22: 0(0,0)
  body extent -2.76,-2.77 2.78,2.77, height 2
"SPACER M3-4ETKLEINEPAD" [mm] "Spacer M3-4ETkleinepad"
  round 6 hole 4.22: 0(0,0)
  body extent -2.76,-2.77 2.78,2.77, height 2
"TESTPOINT 2mm"#1 [mm] "TESTPOINT 2mm"
  round 2 smd paste-2 mask+0: 1(0,0)
"TESTPOINT 2mm"#2 [mm] "TESTPOINT 2mm"
  round 2 smd paste-2 mask+0: 1(0,0.025)
TSOP65P640X110-24N [mm] "TSOP, 24-Leads, Body 7,80x4,40mm, Pitch 0,65mm, IPC Medium Density"
  rect 1.4x0.45 smd: 1(-2.95,3.575) 2(-2.95,2.925) 3(-2.95,2.275) 4(-2.95,1.625) 5(-2.95,0.975) 6(-2.95,0.325) 7(-2.95,-0.325) 8(-2.95,-0.975) 9(-2.95,-1.625) 10(-2.95,-2.275) 11(-2.95,-2.925) 12(-2.95,-3.575) 13(2.95,-3.575) 14(2.95,-2.925) 15(2.95,-2.275) 16(2.95,-1.625) 17(2.95,-0.975) 18(2.95,-0.325) 19(2.95,0.325) 20(2.95,0.975) 21(2.95,1.625) 22(2.95,2.275) 23(2.95,2.925) 24(2.95,3.575)
  silkscreen extent -3.07,-3.95 1.85,4.47, body extent -2.25,-3.95 2.25,3.95, height 1.1
TSSOP50P310X100-8N [mm] "TSSOP, 8-Leads, Body 2,00x2,30mm, Pitch 0,50mm, IPC Medium Density"
  rect 0.8x0.3 smd: 1(-1.6,0.75) 2(-1.6,0.25) 3(-1.6,-0.25) 4(-1.6,-0.75) 5(1.6,-0.75) 6(1.6,-0.25) 7(1.6,0.25) 8(1.6,0.75)
  silkscreen extent -1.72,1.33 -1.48,1.58, body extent -1.2,-1.05 1.2,1.05, height 1
? [mm]
  round 0.7 hole 0.7 unplated paste+0 mask+0: 0(0,0) 0(0,-10.16)
  rect 1.437x0.71 smd paste+0 mask+0: 1(-2.032,0.635) 2(2.032,0.635) 3(-2.032,-0.635) 4(2.032,-0.635) 5(-2.032,-1.905) 6(2.032,-1.905) 7(-2.032,-3.175) 8(2.032,-3.175) 9(-2.032,-4.445) 10(2.032,-4.445) 11(-2.032,-5.715) 12(2.032,-5.715) 13(-2.032,-6.985) 14(2.032,-6.985) 15(-2.032,-8.255) 16(2.032,-8.255) 17(-2.032,-9.525) 18(2.032,-9.525) 19(-2.032,-10.795) 20(2.032,-10.795)
  round 0.954 hole 0.7 mask+0: 1(-0.635,0.635) 2(0.635,0.635) 3(-0.635,-0.635) 4(0.635,-0.635) 5(-0.635,-1.905) 6(0.635,-1.905) 7(-0.635,-3.175) 8(0.635,-3.175) 9(-0.635,-4.445) 10(0.635,-4.445) 11(-0.635,-5.715) 12(0.635,-5.715) 13(-0.635,-6.985) 14(0.635,-6.985) 15(-0.635,-8.255) 16(0.635,-8.255) 17(-0.635,-9.525) 18(0.635,-9.525) 19(-0.635,-10.795) 20(0.635,-10.795)
  Component Side lines w0.635: -2.032,0.635 -0.635,0.635 ; 0.635,0.635 2.032,0.635 ; -2.032,-0.635 -0.635,-0.635 ; 0.635,-0.635 2.032,-0.635 ; -2.032,-1.905 -0.635,-1.905 ; 0.635,-1.905 2,-1.905 ; -2.032,-3.175 -0.635,-3.175 ; 0.635,-3.175 2.032,-3.175 ; -2.032,-4.445 -0.635,-4.445 ; 0.635,-4.445 2.032,-4.445 ; -2.032,-5.715 -0.635,-5.715 ; 0.635,-5.715 2.032,-5.715 ; -2.032,-6.985 -0.635,-6.985 ; 0.635,-6.985 2.032,-6.985 ; -2.032,-8.255 -0.635,-8.255 ; 0.635,-8.255 2.032,-8.255 ; -2.032,-9.525 -0.635,-9.525 ; 0.635,-9.525 2.032,-9.525 ; -2.032,-10.795 -0.635,-10.795 ; 0.635,-10.795 2.032,-10.795
  silkscreen extent -2.28,-11.63 1.7,1.65

## Part data
C1 C2 C3 C4 C5 C6 C8 C9 C11 C12: library part "Cap 100nF X7R 0805", "Cap 100nF X7R 0805 10% 100V"
C7: library part 1uF/10V/0603, "CAP CER 1UF 10V 10% X5R 0603"
C10 C13: library part "Cap 10nF X7R 0805", "Cap 10nF X7R 0805 10% 100V"
C14: library part "CAP ALUM 470UF 20% 10V SMD", "CAP ALUM 470UF 20% 10V SMD"
D1 D2: library part Library_LED-0003, "RO LED GEEL HSMY-C170 0805  AVAGO"
D3 D4 D5 D9: "TVS DIODE 3.3VWM 10.4VC SOD923"
D6 D7 D8 D10: "TVS DIODE 5VWM 12.3VC SOD923"
Fid1 Fid2 Fid3: library part Library_MISC-0003
J1: library part "Header 2_1", "JST B2B-PH-SM4-TB"
J3: library part Library_CON-0019, "RO CONN PR HDR BOX 10p"
J4 J5: library part Library_CON-0019, "RO CONN PR HDR BOX 10p HKS 61201021721 WUERTH"
L3: "FERRIET BLM18PG121SN1D 0603 MURATA"
P1 P2 P3 P5: library part MHDR2X20, "HARWIN - M50-3152042 - SOCKET, DUAL ENTRY, SMT, 40WAY"
P4: library part "Header 2"
P6: library part MHDR2X10, "HARWIN M20"
P7: "Header, 5-Pin"
P8: library part "Header 4", "Header, 4-Pin"
R1 R2: library part 330E/0603, "RES 330 OHM 1/10W 1% 0603 SMD"
R4 R9: library part "Res 191K 0805", "Res 191K 0805 1% 125mW"
R5 R6 R11 R12: library part "Res 4.7K 0805", "Res 1K5 0603 1% 100mW"
R7 R8 R13 R14: library part "Res 4.7K 0805", "Res 4.7K 0805 1% 100mW"
R18 R19: library part 47k/0603, "RES 47.0K OHM 1/10W 1% 0603 SMD"
R20 R21: library part 2.2k/0603, "RES 22R OHM 63mW 1% 0603 SMD"
SP2 SP3: "MOER-SMD SMTSO-M3-2ET  PEM"
TP1 TP2 TP3 TP4 TP5 TP6 TP7 TP8 TP9 TP10 TP11 TP12 TP13 TP14 TP15 TP16 TP17 TP18 TP19 TP20 TP21 TP22 TP23: "Testpoint, 2mm, round"
U1 U4: "2-bit translaing transceiver"
U2 U5: library part "IC PCA9306", "IC PCA9306 Voltage Level translator"
U3: "8-bit translaing transceiver"

## Free pads (board coordinates)
  round 0 hole 2.7 unplated: 0(10.4,5.2)
  round 0 hole 4.75 unplated: 0(10.4,64.45)
  round 0 hole 3 unplated: 0(24.215,37.715)
  round 0 hole 4.2 unplated: 0(67.254,10.149) 0(72.969,9.641)

## Via types
v1: diameter 0.6, hole 0.3, Component Side to Solder Side, 63 vias
v2: diameter 0.6, hole 0.3, Component Side to Solder Side, tented both sides, 38 vias
v3: diameter 1, hole 0.5, Component Side to Solder Side, tented both sides, 2 vias
v4: diameter 1, hole 0.5, Component Side to Solder Side, 1 vias

## Nets (pads, with @x,y where several pads share a name; then routed paths per layer and width w, separated by ;. In a path a pad name is that pad's centre, name@x,y a point inside that pad or via, vN(x,y) a via of type N, cw(c..) or ccw(c..) an arc to the next point about the centre after c; other vN are vias at no path point)
+3.3V: C1.1 C3.1 C8.2 C9.1 C12.2 D9.1 J5.8 P1.3 P2.3 P3.3 P5.3 P6.1 R7.2 R8.2 R13.2 R14.2 R18.1 U1.8 U2.2 U3.1 U4.8 U5.2 | length 28.4
  Component Side w0.2: U2.2@23.6,40.75 23.6,39.668 23.75,39.518 26.957,39.518 C8.2@27.05,39.425 ; R8.2@29.9,43 v1(31.225,43) ; R7.2@29.9,45.075 v1(31.225,45.075)
  Component Side w0.203: C3.1@20.8,30.6 C3.1@21.025,30.825 ; P2.3@29.491,39.114 29.566,39.189 P2.3@29.65,39.105 ; C12.2@75.275,42.425 75.9,41.8 v1(75.9,40.85) 77.45,40.85 77.875,40.425 U5.2@77.875,39.2 ; v1(76.2,35.35) R13.2@77.725,35.35 R14.2@79.8,35.35 ; v1(78.575,4.525) C1.1@80.1,4.525 81.9,4.525 R18.1@82,4.425 ; C9.1@83.3,12.15 v1(83.3,13.325) U4.8@83.3,14.175 ; C9.1@83.475,11.75 C9.1@83.475,11.975 ; U3.1@83.825,9.8 85.05,9.8 v1(85.55,10.3)
  Component Side w0.3: v1(18.575,21.75) D9.1@18.575,22.575 ; U1.8@19.375,30.6 C3.1@20.8,30.6 ; v2(21.025,29.45) C3.1@21.025,30.825 ; C8.2@27.05,39.425 C8.2@27.25,39.225
  Component Side w0.508: P6.1@69.42,49.445 P6.1@69.42,49.625
  Component Side w0.635: P2.3@29.452,39.075 P2.3@29.491,39.114
  other v1: 25.775,39.518
+5V: C2.1 C4.1 C11.1 C14.1 D7.1 D8.1 D10.1 J3.6 J4.10 J5.10 L3.1 P1.1 P2.1 P3.1 P4.1 P5.1 R4.2 R5.2 R6.2 R9.2 R11.2 R12.2 R19.1 U1.1 U3.23 U3.24 U4.1 | length 30.2
  Component Side w0.3: J5.10@12.868,24.174 13.696,25.002 D8.1@13.696,26.879 ; J4.10@12.868,46.224 13.7,47.056 D7.1@13.7,48.75 ; U1.1@19.375,33.8 19.375,34.525 C4.1@20.425,35.575 v1(20.425,37.05) ; R4.2@21.9,48 21.925,48.025 v2(21.925,49.175) ; R5.2@23.75,47.625 v2@23.75,48.725 ; R6.2@25.425,47.675 v2(25.425,48.775) ; v1(71.075,47.475) R9.2@72.45,47.475 ; R11.2@76.425,47.125 v1(76.425,48.225) ; R12.2@78.075,47.125 v1(78.075,48.2) ; U4.1@86.5,14.175 v1(87.25,13.425) ; R19.1@88.675,11.35 v2(90,11.35) ; C2.1@88.8,13.125 v2(88.8,14.4) C11.1@88.8,15.65 ; U3.23@89.725,9.15 88.575,9.15 v1(88.175,9.55) 88.425,9.8 U3.24@89.725,9.8 ; v1(91.9,30.025) D10.1@91.9,30.9
  Component Side w0.56: L3.1@83.925,45.45 v4(83.925,47.15)
  Component Side w1: v3(65.175,2.75) C14.1@65.175,5.525
  other v2: 23.775,48.725
BUZZER3.3: P2.15 TP12.1 U1.6 | length 20.4
  Component Side w0.2: v1(18.05,32.125) 18.375,31.8 U1.6@18.375,30.6
  Solder Side w0.2: TP12.1@15.5,30.85 16.775,32.125 v1(18.05,32.125) 18.05,32.15 18.65,32.75 21.6,32.75 23.57,34.72 26.826,34.72 28.553,32.992 28.553,32.325 29.393,31.485 P2.15@30.94,31.485
BUZZER5: TP11.1 U1.3 U7.1 | length 7.6
  Component Side w0.2: U1.3@18.375,33.8 18.375,34.475 18.15,34.7 18.15,35.475 19.375,36.7 19.375,38.564 U7.1@18.989,38.95
  Solder Side w0.2: v1(19.4,37.825) 19.7,37.825 TP11.1@20.675,38.8
CLK: U3.19 U8.3 | length 14
  Component Side w0.203: U8.3@86.775,17.711 86.775,17.025 87.881,15.918 87.881,10.331 87.225,9.675 87.225,7.175 87.85,6.55 U3.19@89.725,6.55
GND: C1.2 C2.2 C3.2 C4.2 C5.2 C6.2 C7.1 C8.1 C9.2 C10.1 C11.2 C12.1 C13.1 C14.2 D1.2 D2.2 D3.2 D4.2 D5.2 D6.2 D7.2 D8.2 D9.2 D10.2 J1.0 J2.0 J2.2 J2.5 J3.2 J3.4 J3.10 J4.3 J4.5 J4.8 J4.9 J5.2 J5.4 J5.6 J5.7 J5.9 P1.2 P1.4 P2.2 P3.2 P4.2 P5.2 P5.4 P6.2 U1.4 U1.5 U2.1 U3.7 U3.8 U3.9 U3.10 U3.11 U3.12 U3.13 U3.14 U3.15 U3.16 U3.17 U3.22 U4.4 U5.1 U6.2 U6.5 U7.5 U7.6 U7.7 U7.8 U7.13 U8.13 | length 38
  Component Side w0.2: U7.8@17.761,40.95 U7.7@17.761,41.45 ; v1(17.875,29.4) U1.5@17.875,30.6 ; U7.5@18.989,40.95 U7.6@18.989,41.45 ; C3.2@21,32.75 C3.2@21.025,32.725
  Component Side w0.3: v1@12.225,51.175 D3.2@12.225,52.3 ; D8.2@14.596,26.879 14.596,25.829 v2(14.6,25.825) ; v2@14.6,47.8 D7.2@14.6,48.75 ; v1(17.525,14.65) D5.2@17.525,15.65 ; v1(17.525,17.325) D4.2@17.525,18.2 ; v1(18.15,38.275) 18.375,38.5 U7.13@18.375,40.2 18.375,42.2 v1(18.4,42.225) ; D9.2@18.575,23.475 v1(18.575,24.45) ; C10.1@19.8,48 v1(19.8,49.2) ; C3.2@21,32.75 v1(21,33.975) 21.8,33.975 22.325,34.5 C4.2@22.325,35.575 ; v1(22.026,39.577) 22.373,39.577 22.375,39.575 22.95,40.15 U2.1@22.95,40.75 ; v1(27.25,35.9) C8.1@27.25,37.325 ; C5.2@49.65,6.3 v1(49.65,7.75) ; v1(49.675,2.825) C6.2@49.675,4.225 ; C12.1@73.375,42.425 v2(73.375,44.025) ; v1(75.925,39.2) U5.1@77.225,39.2 ; v1(84.875,13.275) 85.375,12.775 C9.2@85.375,11.75 ; v1(85.025,18.35) 85.05,18.325 U8.13@87.025,18.325 88.9,18.325 v1(89,18.425) ; v2(85.875,16.4) 85.875,16 86.2,15.675 U4.4@86.5,15.675 ; v2@87.775,41.375 D6.2@87.775,42.3 ; D10.2@91.9,31.8 v1@91.9,32.95
  Component Side w1: v3(59.675,2.725) C14.2@59.675,5.525
  other v1: 78.525,2.525 28.75,3.125 87.85,3.175 85.6,3.275 91.425,4 85.6,4.6 91.425,5.3 85.55,5.95 28.725,6.125 88.15,8.075 72.325,12.425 16.375,15.325 18.65,15.675 16.325,17.95 18.627,18.2 68.825,22.2 91.925,32.975 21.875,37.2 12.2,51.15 10.823,52.098 13.425,52.175
  other v2: 91.475,2.65 90.9,10.7 90.7,14.4 75.425,18.8 28.425,23.225 85.575,41.1 88.575,41.325 87.75,41.35 86.8,41.8 86.8,42.575 80.2,44.425 80.2,46.1 80.225,47.75 14.625,47.775
HPCOM: L2.1 P1.16 R21.2 | length 64.2
  Component Side w0.3: L2.1@41.975,4.275 v2(43.275,4.275) R21.2@44.475,4.275
  Solder Side w0.3: v2(43.275,4.275) 44.09,5.09 76.265,5.09 77.003,5.828 77.003,15.308 74.478,17.833 74.478,29.857 P1.16@72.85,31.485
HPOUTR: L1.1 P1.18 R20.2 | length 62.2
  Component Side w0.3: L1.1@41.95,6.35 v2(43.275,6.35) R20.2@44.425,6.35
  Solder Side w0.3: v2(43.275,6.35) 44.032,5.593 76.057,5.593 76.5,6.037 76.5,15.1 73.975,17.625 73.975,29.648 73.408,30.215 P1.18@72.85,30.215
MISO: U4.2 U8.2 | length 4.4
  Component Side w0.203: U8.2@86.275,17.711 86.275,16.95 87.475,15.75 87.475,14.925 87.225,14.675 U4.2@86.5,14.675
MOSI: U3.20 U8.5 | length 16.5
  Component Side w0.203: U8.5@87.775,17.711 87.775,17.225 87.844,17.156 91.668,17.156 92.069,16.756 92.069,7.868 91.4,7.2 U3.20@89.725,7.2
NetC5_1: C5.1 R20.1 | length 1.7
  Component Side w0.3: R20.1@46.075,6.3 C5.1@47.75,6.3
NetC6_1: C6.1 R21.1 | length 1.6
  Component Side w0.3: R21.1@46.1,4.3 C6.1@47.7,4.3
NetC7_2: C7.2 D6.1 J2.1 L3.2 | length 18.3
  Component Side w0.3: D6.1@88.675,42.3 88.675,43.75 88.775,43.85
  Component Side w0.5: C7.2@83.95,42.2 83.925,42.225 L3.2@83.925,43.85 88.775,43.85 90.75,45.825 90.75,51.1 89.9,51.95 J2.1@88.95,51.95
NetC10_2: C10.2 R4.1 TP2.1 U2.7 U2.8 | length 11.1
  Component Side w0.2: v1(18.275,45.725) 18.65,46.1 C10.2@19.8,46.1 ; U2.8@22.95,44.15 22.95,43.15 23.125,42.975 23.45,42.975 23.6,43.125 U2.7@23.6,44.15
  Component Side w0.3: C10.2@19.8,46.1 R4.1@21.9,46.1 21.9,44.6 22.35,44.15 U2.8@22.95,44.15
  Solder Side w0.2: TP2.1@18.275,43.95 v1(18.275,45.725)